# EAGLE board CAN-BUS Shield  v0.9b (EAGLE 7.2.0)
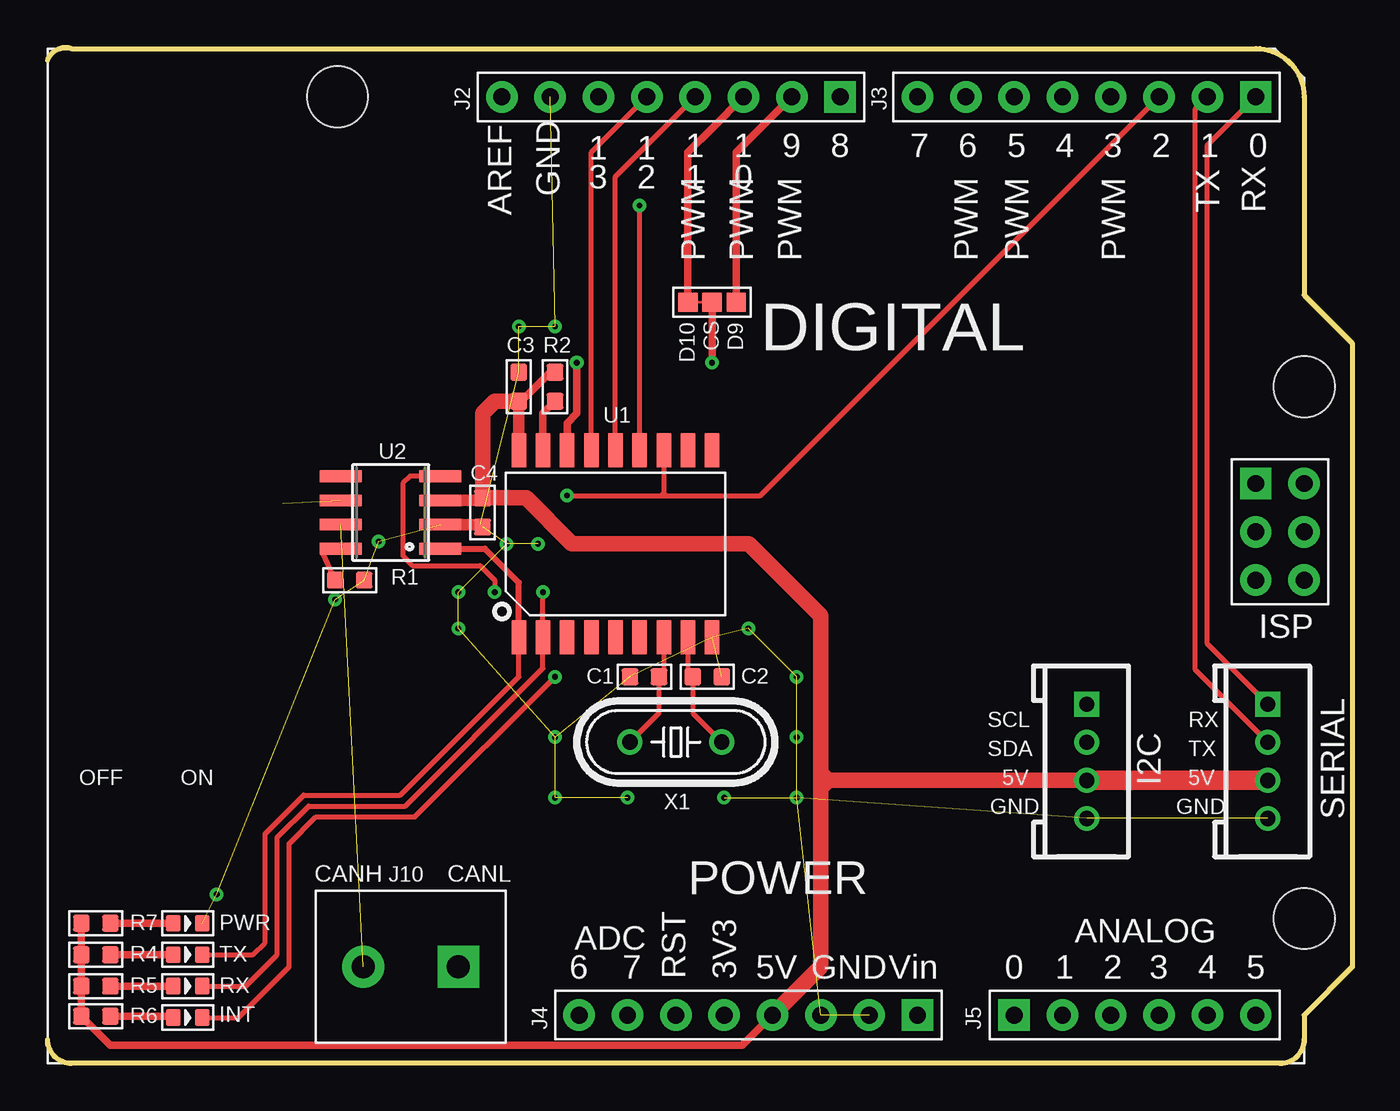
[diagram p0: board, top side]
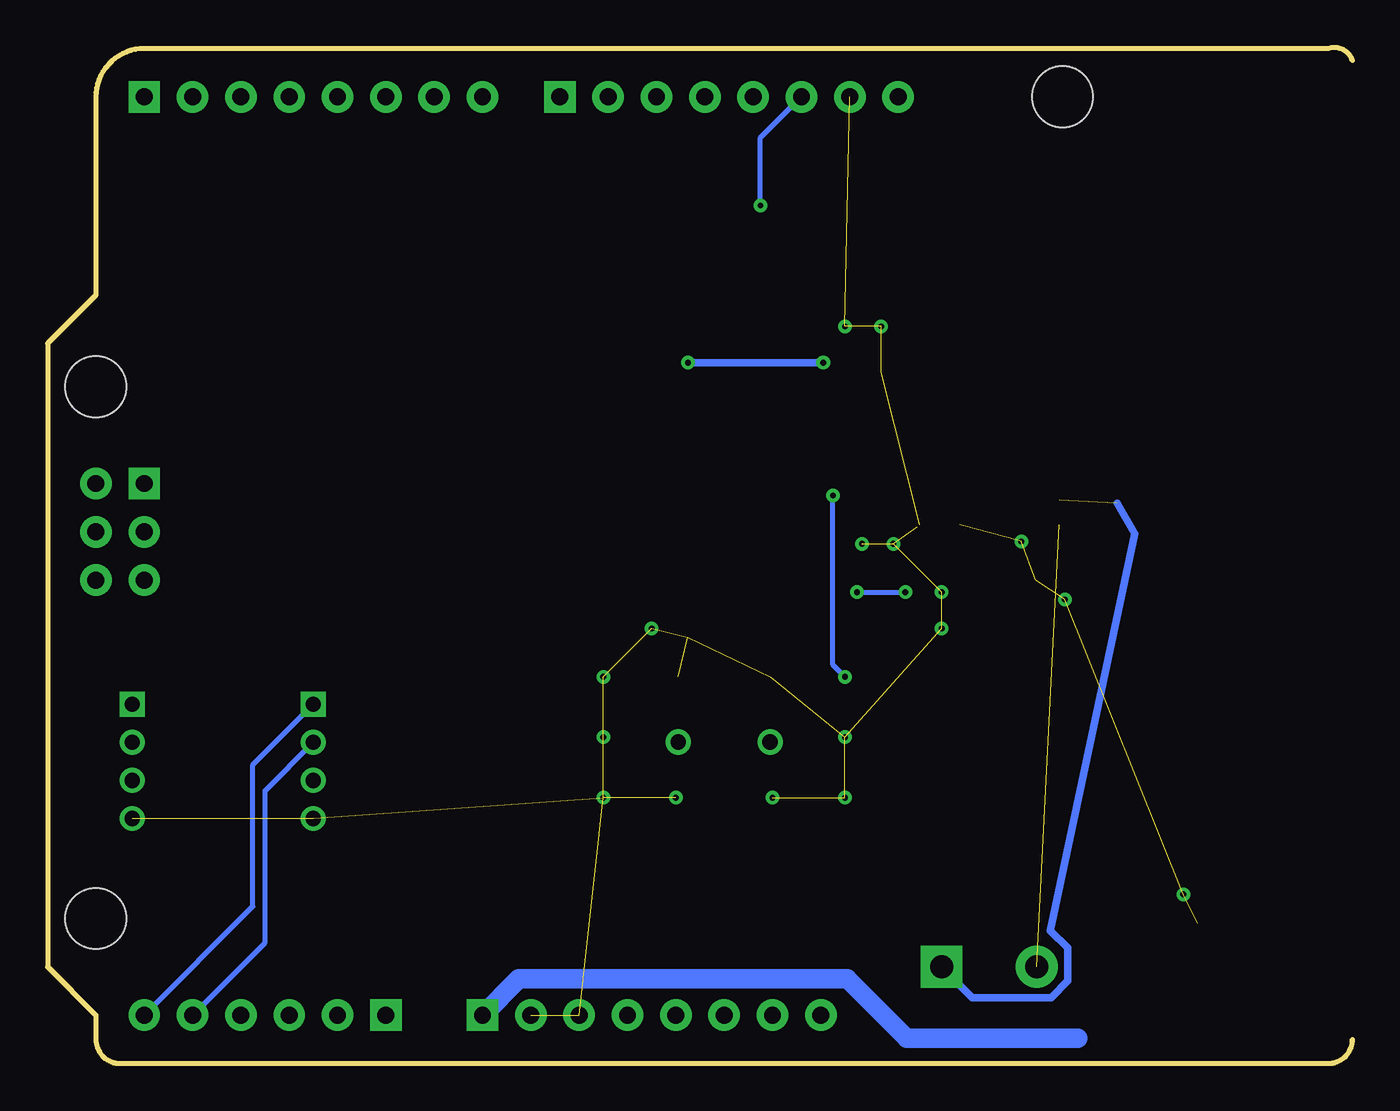
[diagram p1: board, bottom side, seen from below]

Size 68.58 x 53.39 mm. Coordinates in mm from the lower left corner, seen from the top.
Outline: 0,1.27 arc90 1.27,0 64.77,0 arc90 66.04,1.27 66.04,2.54 68.58,5.08 68.58,37.85 66.04,40.39 66.04,50.8 arc90 63.5,53.34 1.27,53.34 arc90 0,52.7
Copper layers (1*16): Top 0.035mm / dielectric 1.5mm / Bottom 0.035mm
Design rules "default": minimum track width 10mil, minimum drill 12mil, track to track 8mil, track to pad 8mil, pad to pad 8mil, via to via 8mil, smd to smd 8mil, copper to edge 10mil, drill to drill 8mil, minimum pad ring 10mil, minimum via ring 8mil, stop-mask expansion 4mil, vias tented up to drill 25mil, thermal gap 10mil
Net classes: 0 default: width 0.203 mm, drill 0.305 mm, clearance 0.203 mm

## Footprints (pad centres in the part's own frame; a part is rotated, then mirrored left to right if it is on the bottom)
0603 = smd 0.889 x 0.889: 1 -0.762,0; 2 0.762,0
3P-SMD-4.1X1.5 = smd 1.016 x 1.016: 00 -1.27,0; 11 1.27,0; MM 0,0
4P-2.0 = drill 0.8 pad 1.27 square: 1 -3,0 | drill 0.8 pad 1.27: 2 -1,0; 3 1,0; 4 3,0
LED-0603 = smd 0.762 x 0.889: + -0.762,0; - 0.762,0
2P-5.0 = drill 1.2 pad 2.184 square: 1 0,0 | drill 1.2 pad 2.184: 2 5,0
SOIC18 = smd 0.762 x 1.778: 1 -5.08,-4.915; 2 -3.81,-4.915; 3 -2.54,-4.915; 4 -1.27,-4.915; 5 0,-4.915; 6 1.27,-4.915; 7 2.54,-4.915; 8 3.81,-4.915; 9 5.08,-4.915; 10 5.08,4.915; 11 3.81,4.915; 12 2.54,4.915; 13 1.27,4.915; 14 0,4.915; 15 -1.27,4.915; 16 -2.54,4.915; 17 -3.81,4.915; 18 -5.08,4.915
SO08 = smd 0.61 x 2.21: 1 -1.905,-2.616; 2 -0.635,-2.616; 3 0.635,-2.616; 4 1.905,-2.616; 5 1.905,2.616; 6 0.635,2.616; 7 -0.635,2.616; 8 -1.905,2.616
ARDUINO = drill 0.889 pad 1.651 square: 1 63.5,50.8; 9 41.656,50.8; 17 50.8,2.54; 23 45.72,2.54; 36 63.5,30.48 | drill 0.889 pad 1.651: 2 60.96,50.8; 3 58.42,50.8; 4 55.88,50.8; 5 53.34,50.8; 6 50.8,50.8; 7 48.26,50.8; 8 45.72,50.8; 10 39.116,50.8; 11 36.576,50.8; 12 34.036,50.8; 13 31.496,50.8; 14 28.956,50.8; 15 26.416,50.8; 16 23.876,50.8; 18 53.34,2.54; 19 55.88,2.54; 20 58.42,2.54; 21 60.96,2.54; 22 63.5,2.54; 24 43.18,2.54; 25 40.64,2.54; 26 38.1,2.54; 27 35.56,2.54; 28 33.02,2.54; 29 30.48,2.54; 30 27.94,2.54; 31 66.04,30.48; 32 66.04,27.94; 33 66.04,25.4; 34 63.5,25.4; 35 63.5,27.94 | hole 3.2: 15.24,50.8; 66.04,35.56; 66.04,7.62
HC49/S = drill 0.813: 1 -2.413,0; 2 2.413,0

## Placement (x,y rotation side)
C1  22pF  [0603]  31.37,20.32 0 top
C2  22pF  [0603]  34.67,20.32 180 top
C3  100nF  [0603]  24.77,35.56 90 top
C4  100nF  [0603]  22.86,28.96 270 top
CS  [3P-SMD-4.1X1.5]  34.92,40.01 0 top
I2C  [4P-2.0]  54.61,15.88 270 top
INT  RED  [LED-0603]  7.37,2.41 0 top
J10  [2P-5.0]  21.59,5.08 180 top
PWR  GREEN  [LED-0603]  7.37,7.37 0 top
R1  47k  [0603]  15.88,25.4 0 top
R2  10k  [0603]  26.67,35.56 90 top
R4  1k  [0603]  2.54,5.71 180 top
R5  1k  [0603]  2.54,4.06 180 top
R6  1k  [0603]  2.54,2.48 180 top
R7  1k  [0603]  2.54,7.37 180 top
RX  RED  [LED-0603]  7.37,4.06 0 top
SERIAL  [4P-2.0]  64.14,15.88 270 top
TX  RED  [LED-0603]  7.37,5.71 0 top
U1  MCP2515  [SOIC18]  29.84,27.3 0 top
U2  MCP2551  [SO08]  18.03,28.96 90 top
U3  [ARDUINO]  0,0 0 top
X1  16MHz  [HC49/S]  33.02,16.89 180 top

## Library data of the parts
C1-C4 CS PWR R1 R2 R4-R6 X1 = Discrete
I2C = Connector; DESCRIPTION: microOBD 200 OBD-II Module; HW_REV: 1.4; PCB_REV: C; PCB_SPEC1: Layer Count: 4; PCB_SPEC2: Size: 1.3" x 0.59"; PCB_SPEC3: Finish Thickness: 0.049" - 0.052"; PCB_SPEC4: Copper Weight: 1oz; TITLE: STM1120
INT R7 RX TX = Discrete; DESCRIPTION: microOBD 200 OBD-II Module; HW_REV: 1.4; PCB_REV: C; PCB_SPEC1: Layer Count: 4; PCB_SPEC2: Size: 1.3" x 0.59"; PCB_SPEC3: Finish Thickness: 0.049" - 0.052"; PCB_SPEC4: Copper Weight: 1oz; TITLE: STM1120
J10 SERIAL = Connector
U1 U2 = IC
U3 = Module

## Nets
3V3: U3.27
5V: C3.1 C4.1 I2C.3 R2.2 R4.2 R5.2 R6.2 R7.2 SERIAL.3 U1.18 U2.3 U3.26
ADC0: U3.17
ADC1: U3.18
ADC2: U3.19
ADC3: U3.20
ADC4: I2C.2 U3.21
ADC5: I2C.1 U3.22
ADC6: U3.30
ADC7: U3.29
CANH: J10.2 U2.7
CANL: J10.1 U2.6
CS: CS.00 CS.MM U1.16 U3.11
GND: C1.1 C2.1 C3.2 C4.2 I2C.4 PWR.- R1.2 SERIAL.4 U1.9 U2.2 U3.15 U3.24 U3.25
INT: INT.- U1.12 U3.3
IO0: SERIAL.1 U3.1
IO1: SERIAL.2 U3.2
IO3: U3.4
IO4: U3.5
IO5: U3.6
IO6: U3.7
IO7: U3.8
IO8: U3.9
IO9: CS.11 U3.10
MISO: U1.15 U3.13
MOSI: U1.14 U3.12
N$1: PWR.+ R7.1
N$2: R4.1 TX.+
N$15: R5.1 RX.+
N$16: C1.2 U1.7 X1.2
N$17: C2.2 U1.8 X1.1
N$19: INT.+ R6.1
N$20: R1.1 U2.8
REF: U3.16
RST: U3.28
RST_N: R2.1 U1.17
RX_CAN: RX.- U1.2 U2.4
SCK: U1.13 U3.14
TX_CAN: TX.- U1.1 U2.1
VIN: U3.23

## Tracks (layer width: path | path; a pad name or v marks a point on that pad's centre or on a via)
5V
  Top 0.254: R4.2 1.78,5.59
  Top 0.406: 1.78,5.59 R5.2 R6.2 3.3,0.95 36.51,0.95 U3.26 | R4.2 R7.2 | 24.89,34.92 25.02,34.92 26.42,36.32 R2.2
  Top 0.61: U1.18 C3.1 24.89,34.92 | U2.3 22.99,29.59 C4.1
  Top 0.813: 40.64,15.24 40.64,23.52 36.85,27.3 27.56,27.3 25.15,29.72 C4.1 22.86,34.16 23.5,34.8 C3.1 | 40.64,15.24 40.64,14.99 | 40.64,14.99 40.64,14.48 | 40.64,14.48 40.64,5.08 U3.26 | I2C.3 41.04,14.88 | 41.01,14.88 40.75,14.88 40.64,14.99 | 41.04,14.88 41.01,14.88 | 41.01,14.88 40.64,15.24 | 41.04,14.88 40.64,14.48
  Top 1.016: I2C.3 SERIAL.3
ADC4
  Bottom 0.254: U3.21 57.15,6.35 57.15,14.34 I2C.2
ADC5
  Bottom 0.254: U3.22 57.78,8.26 57.78,15.7 I2C.1
CANH  (1 unrouted)
CANL  (1 unrouted)
  Top 0.406: 21.84,5.33 J10.1
  Bottom 0.406: J10.1 19.97,3.46 15.84,3.46 14.97,4.34 14.97,6.08 15.88,6.99 11.43,27.84 12.37,29.44
CS  (via drill 0.3 pad 0.64)
  Top 0.127: CS.00 CS.MM
  Top 0.406: U3.11 34.92,49.15 33.66,47.88 CS.00 | v34.92,36.83 CS.MM | v27.81,36.83 27.81,34.16 27.3,33.66 U1.16
  Bottom 0.406: v27.81,36.83 v34.92,36.83
GND  (via drill 0.3 pad 0.64)  (28 unrouted)
  Top 0.61: U2.2 22.73,28.32 C4.2
  other vias: 24.13,27.3 17.4,27.43 24.77,38.73 26.67,38.73 25.78,27.3 21.59,22.86 21.59,24.77 15.11,24.38 8.89,8.89 26.67,17.14 26.67,13.97 30.48,13.97 39.37,17.14 39.37,20.32 36.83,22.86 35.56,13.97 39.37,13.97
INT  (via drill 0.3 pad 0.64)
  Top 0.254: INT.- 10.03,2.41 12.7,5.08 12.7,11.56 14.1,12.95 19.3,12.95 v26.67,20.32 | U1.12 32.38,29.84 | 32.51,29.84 37.47,29.84 U3.3 | v27.3,29.84 32.26,29.84 | 32.26,29.84 32.38,29.84 | 32.38,29.84 32.51,29.84 | 32.26,29.84 32.38,29.97 32.51,29.84
  Bottom 0.254: v26.67,20.32 27.3,20.95 v27.3,29.84
IO0
  Top 0.254: SERIAL.1 60.96,22.05 60.96,48.26 U3.1
IO1
  Top 0.254: SERIAL.2 60.33,20.68 60.33,50.16 U3.2
IO9
  Top 0.406: CS.11 36.2,47.88 U3.10
MISO
  Top 0.254: U1.15 28.57,47.88 U3.13
MOSI
  Top 0.254: U1.14 29.84,46.61 U3.12
N$1
  Top 0.406: R7.1 PWR.+
N$2
  Top 0.406: R4.1 TX.+
N$15
  Top 0.406: R5.1 RX.+
N$16
  Top 0.254: U1.7 32.38,20.57 C1.2 32.13,18.41 X1.2
N$17
  Top 0.254: U1.8 33.66,20.57 C2.2 33.91,18.41 X1.1
N$19
  Top 0.406: R6.1 6.54,2.48 INT.+
N$20
  Top 0.254: R1.1 14.48,26.8 14.73,27.05 U2.8
RST_N
  Top 0.406: U1.17 26.04,34.16 R2.1
RX_CAN  (via drill 0.3 pad 0.64)
  Top 0.254: RX.- 10.41,4.06 12.06,5.71 12.06,11.87 13.72,13.53 18.8,13.53 26.04,20.77 U1.2 v26.04,24.77 | U2.4 19.05,30.86 18.67,30.48 18.67,26.67 19.18,26.16 22.73,26.16 23.5,25.4 v23.5,24.77
  Bottom 0.254: v26.04,24.77 v23.5,24.77
SCK  (via drill 0.3 pad 0.64)
  Top 0.254: U1.13 31.11,33.27 v31.11,45.09
  Bottom 0.254: v31.11,45.09 31.11,48.64 U3.14
TX_CAN
  Top 0.254: TX.- 10.79,5.71 11.43,6.35 11.43,12.06 13.46,14.1 18.54,14.1 24.77,20.32 U1.1
  Top 0.305: U2.1 22.99,27.05 24.77,25.27 U1.1
VIN
  Bottom 1.016: U3.23 43.81,4.45 26.54,4.45 23.41,1.32 14.43,1.32

## Text on the board
tPlace: J2 | J3 | D10 | D9 | SCL | RX | SDA | TX | OFF | ON | 5V | 5V | GND | GND | CANH | CANL | J4 | J5
tNames: ISP